# EAGLE board KombyPiPi (EAGLE 7.2.0)
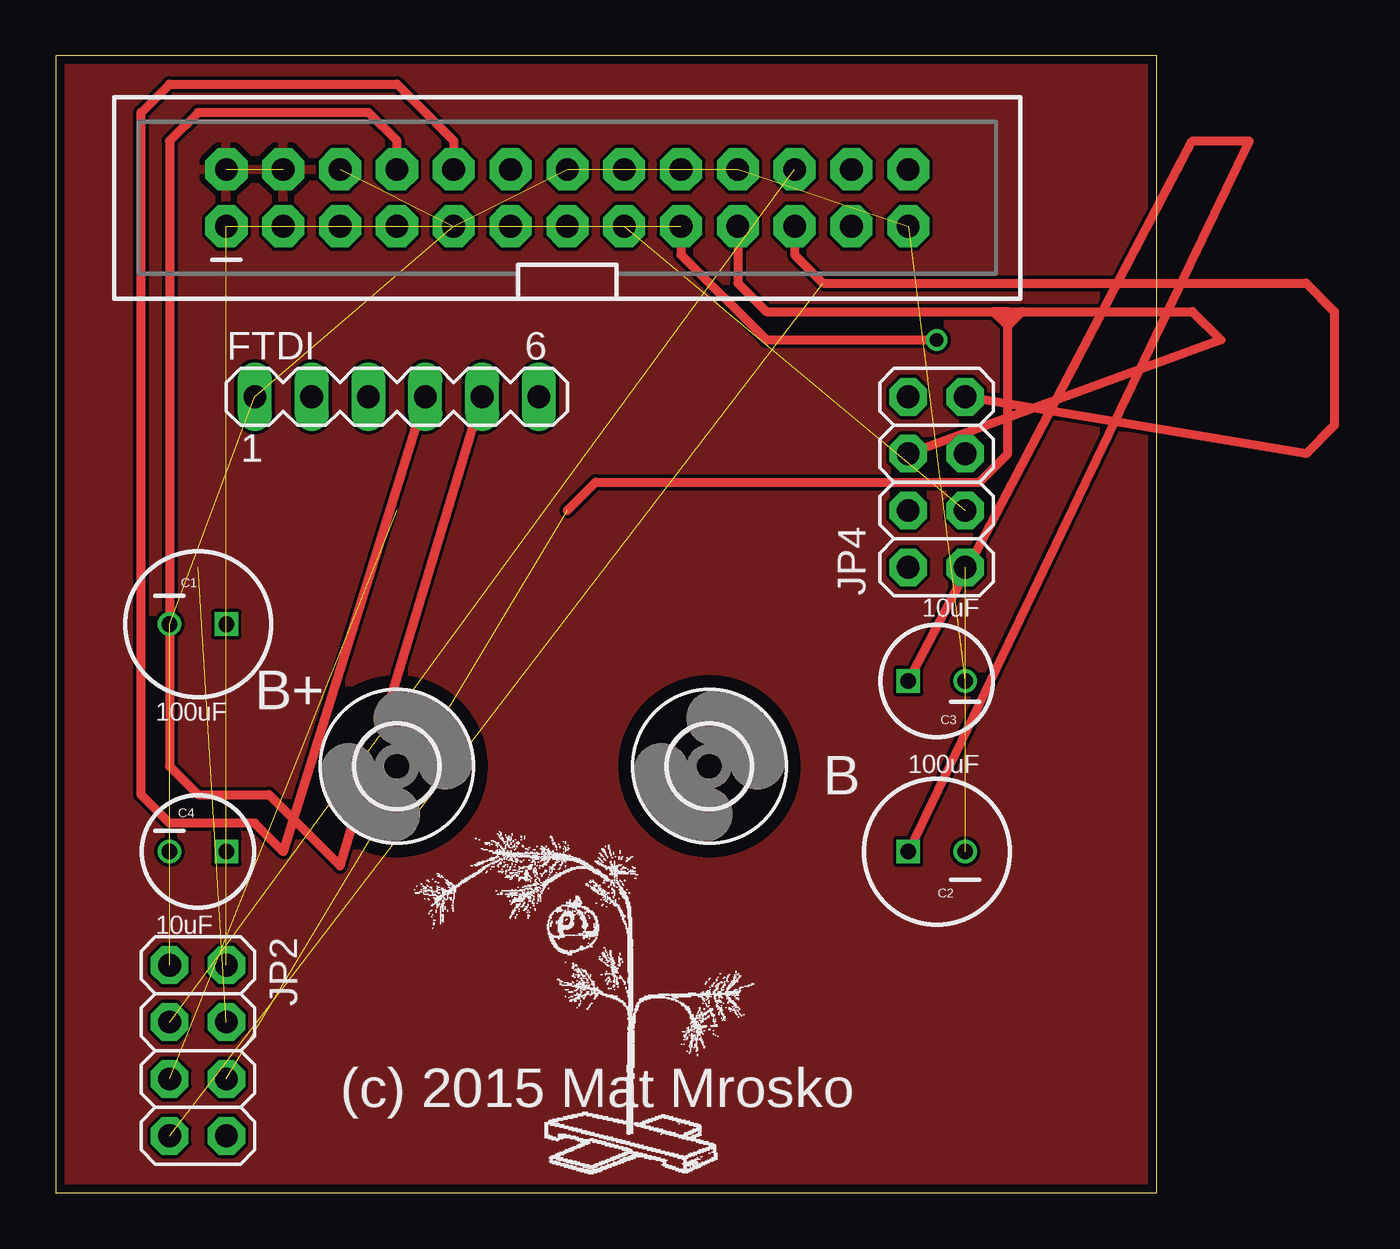
[diagram p0: board, top side]
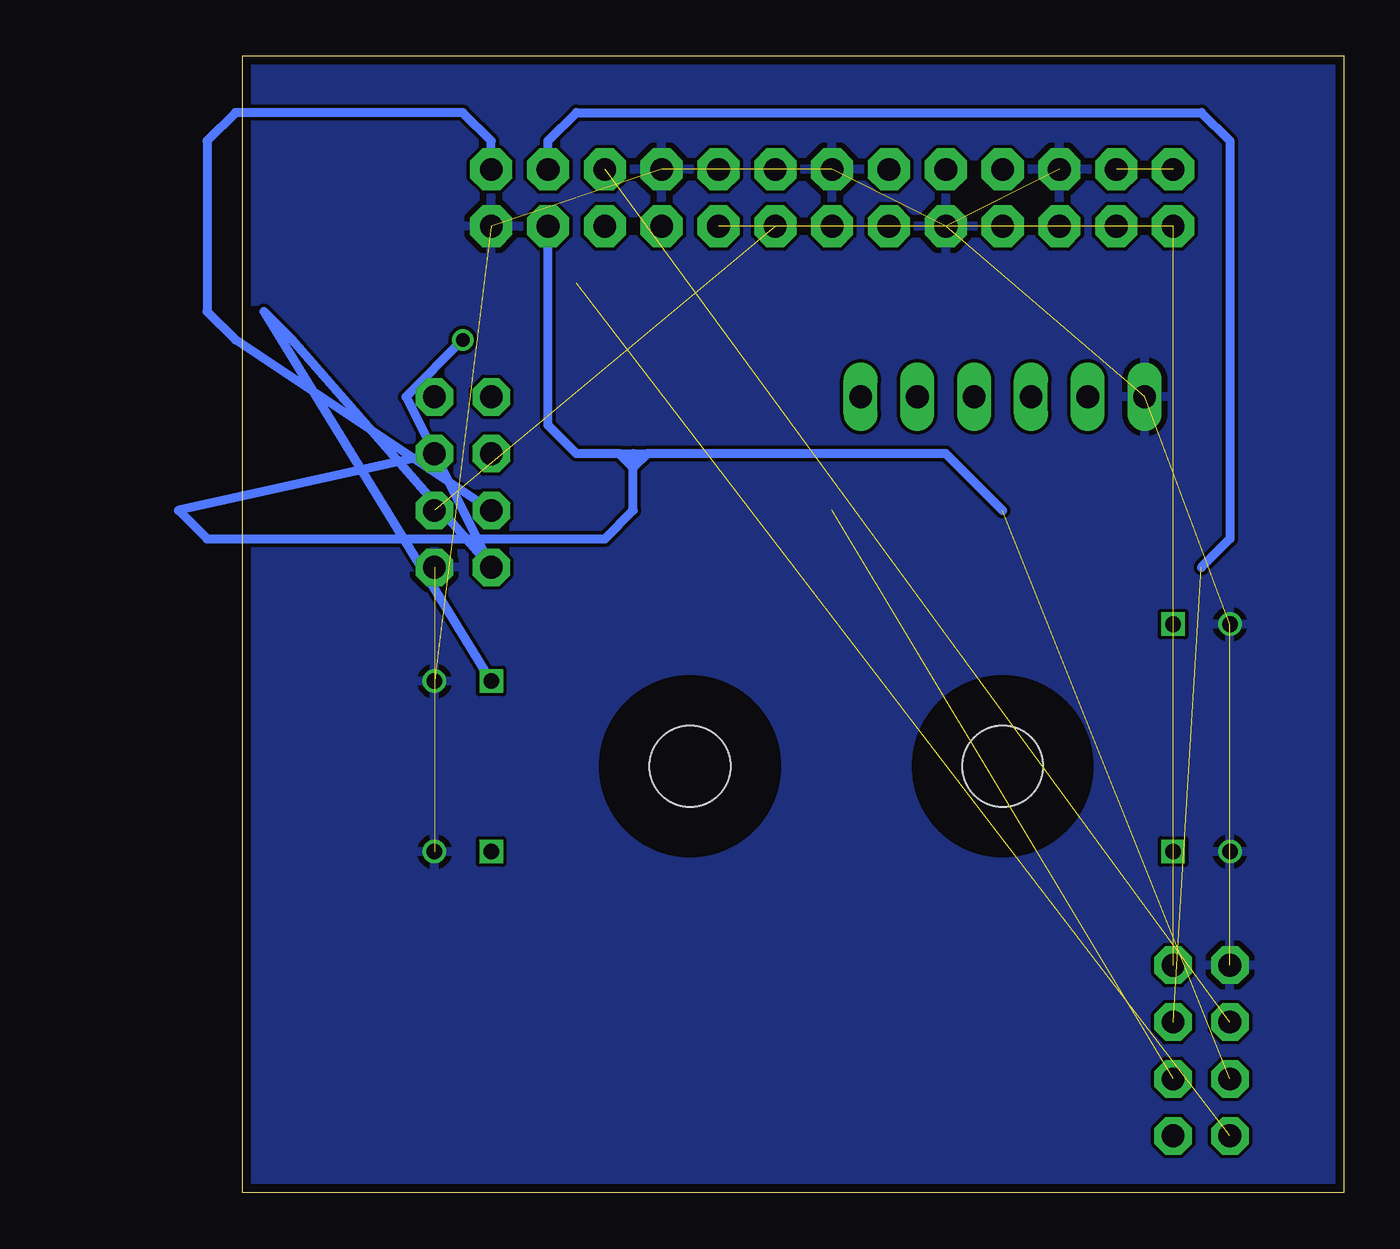
[diagram p1: board, bottom side, seen from below]

Size 49.2 x 50.79 mm. Coordinates in mm from the lower left corner, seen from the top.
Outline: 0,0 49.2,0 49.2,50.79 0,50.79 0,0
Copper layers (1*16): Top 0.0356mm / dielectric 1.5011mm / Bottom 0.0356mm
Design rules "oshpark": minimum track width 6mil, minimum drill 13mil, track to track 6mil, track to pad 6mil, pad to pad 6mil, via to via 6mil, smd to smd 6mil, copper to edge 15mil, drill to drill 6mil, minimum pad ring 7mil, minimum via ring 7mil, stop-mask expansion 4mil, vias tented up to drill 0mil, thermal gap 10mil
Net classes: 1 RFBoard: width 0.406 mm

## Footprints (pad centres in the part's own frame; a part is rotated, then mirrored left to right if it is on the bottom)
CPOL-RADIAL-100UF-25V = drill 0.7 square: 1 1.27,0 | drill 0.7: 2 -1.27,0
CPOL-RADIAL-10UF-25V = drill 0.7 square: 1 1.27,0 | drill 0.7: 2 -1.27,0
MA06-1 = drill 1.016 long: 1 -6.35,0; 2 -3.81,0; 3 -1.27,0; 4 1.27,0; 5 3.81,0; 6 6.35,0
2X13-SHROUDED = drill 1.016 pad 1.88 octagon: 1 -1.27,15.24; 2 1.27,15.24; 3 -1.27,12.7; 4 1.27,12.7; 5 -1.27,10.16; 6 1.27,10.16; 7 -1.27,7.62; 8 1.27,7.62; 9 -1.27,5.08; 10 1.27,5.08; 11 -1.27,2.54; 12 1.27,2.54; 13 -1.27,0; 14 1.27,0; 15 -1.27,-2.54; 16 1.27,-2.54; 17 -1.27,-5.08; 18 1.27,-5.08; 19 -1.27,-7.62; 20 1.27,-7.62; 21 -1.27,-10.16; 22 1.27,-10.16; 23 -1.27,-12.7; 24 1.27,-12.7; 25 -1.27,-15.24; 26 1.27,-15.24
2X04 = drill 1.016 pad 1.676 octagon: 1 -3.81,-1.27; 2 -3.81,1.27; 3 -1.27,-1.27; 4 -1.27,1.27; 5 1.27,-1.27; 6 1.27,1.27; 7 3.81,-1.27; 8 3.81,1.27
3,6 = hole 3.6: 0,0

## Placement (x,y rotation side)
C1  100uF  [CPOL-RADIAL-100UF-25V]  6.35,25.4 0 top
C2  100uF  [CPOL-RADIAL-100UF-25V]  39.37,15.24 180 top
C3  10uF  [CPOL-RADIAL-10UF-25V]  39.37,22.86 180 top
C4  10uF  [CPOL-RADIAL-10UF-25V]  6.35,15.24 0 top
FTDI  [MA06-1]  15.24,35.56 0 top
JP1  RASPBERRYPI-GPIOPTH  [2X13-SHROUDED]  22.86,44.45 90 top
JP2  [2X04]  6.35,6.35 270 top
JP4  [2X04]  39.37,31.75 90 top
U$1  [3,6]  29.21,19.05 0 top
U$2  [3,6]  15.24,19.05 0 top
U$3  [DIYC]  15.24,0 0 top

## Library data of the parts
C1-C4 = SparkFun
FTDI = con-lstb; OC_FARNELL: unknown; OC_NEWARK: unknown
JP1 = SparkFun-Boards; DIST: sparkfun; DIST_ID: PRT-11490
JP2 JP4 = adafruit
U$1 U$2 = holes
U$3 = DIYChristmas-org

## Nets
3.3V [RFBoard]: C1.1 C2.1 C3.1 C4.1 JP1.1 JP1.17 JP2.2 JP4.2
CE0: JP1.24 JP2.4
CE1 [RFBoard]: JP1.26 JP4.4
CTS: FTDI.2
FTDI_VCC: FTDI.3
GND: C1.2 C2.2 C3.2 C4.2 FTDI.1 JP1.6 JP1.9 JP1.14 JP1.20 JP1.25 JP2.1 JP4.1
MISO [RFBoard]: JP1.21 JP2.7 JP4.7
MOSI [RFBoard]: JP1.19 JP2.6 JP4.6
RF_CE0: JP1.22 JP2.3
RF_CE1 [RFBoard]: JP1.15 JP4.3
RTS: FTDI.6
RXI: FTDI.4 JP1.10
SCL: JP1.5
SCLK: JP1.23 JP2.5 JP4.5
SDA: JP1.3
TXO: FTDI.5 JP1.8
VCC: JP1.2 JP1.4

## Tracks (layer width: path | path; a pad name or v marks a point on that pad's centre or on a via)
3.3V  (via drill 0.6)  (4 unrouted)
  Top 0.406: C3.1 50.8,46.99 53.34,46.99 C2.1 | JP1.17 27.94,41.91 31.75,38.1 v39.37,38.1
  Bottom 0.406: C3.1 48.26,39.37 46.99,38.1 JP4.2 41.91,35.56 v39.37,38.1
CE0  (1 unrouted)
  Bottom 0.406: JP1.24 35.56,46.99 34.29,48.26 6.35,48.26 5.08,46.99 5.08,29.21 6.35,27.94
CE1
  Bottom 0.406: JP1.26 38.1,46.99 39.37,48.26 49.53,48.26 50.8,46.99 50.8,39.37 49.53,38.1 JP4.4
GND  (11 unrouted)
  pour Bottom: 0,50.8 0,0 49.53,0 49.53,50.8
MISO  (1 unrouted)
  Top 0.406: JP1.21 33.02,41.91 34.29,40.64 55.88,40.64 57.15,39.37 57.15,34.29 55.88,33.02 JP4.7
MOSI  (1 unrouted)
  Top 0.406: JP1.19 30.48,40.64 31.75,39.37 41.91,39.37 | 42.55,39.37 43.18,39.37 | 42.55,39.37 41.91,39.37 | 41.91,39.37 42.55,38.73 43.18,39.37 | 43.18,39.37 50.8,39.37 52.07,38.1 JP4.6 | 22.86,30.48 24.13,31.75 41.27,31.75 42.55,33.02 42.55,39.37
RF_CE0  (1 unrouted)
RF_CE1  (1 unrouted)
RXI
  Top 0.406: FTDI.4 10.16,15.24 8.89,16.51 5.08,16.51 3.81,17.78 3.81,48.26 5.08,49.53 15.24,49.53 17.78,46.99 JP1.10
SCLK  (1 unrouted)
  Bottom 0.406: 15.24,30.48 17.78,33.02 31.11,33.02 | 32.38,33.02 31.11,33.02 | 31.11,33.02 31.75,32.38 | 32.38,33.02 34.29,33.02 35.56,34.29 JP1.23 | JP4.5 52.07,30.48 50.8,29.21 33.02,29.21 31.75,30.48 31.75,32.38 | 31.75,33.02 31.75,32.38 | 31.75,32.38 32.38,33.02
TXO
  Top 0.406: JP1.8 15.24,46.99 13.97,48.26 6.35,48.26 5.08,46.99 5.08,19.05 6.35,17.78 9.53,17.78 12.7,14.61 FTDI.5
VCC  (1 unrouted)
  pour Top: 0,50.8 0,0 49.53,0 49.53,50.8

## Text on the board
tNames: B+ | B | (c) 2015 Mat Mrosko